# Altium PCB PCB2.PcbDoc
Units mil, origin at the board's own origin, x right, y up, seen from the top; angles counter-clockwise.
Board outline 2155 x 1785 mil, 2 copper layers (Top Layer, Bottom Layer); 14 components, 12 nets, 32 pads, 1 vias.
Unrouted connection lines stored in the file: 1.
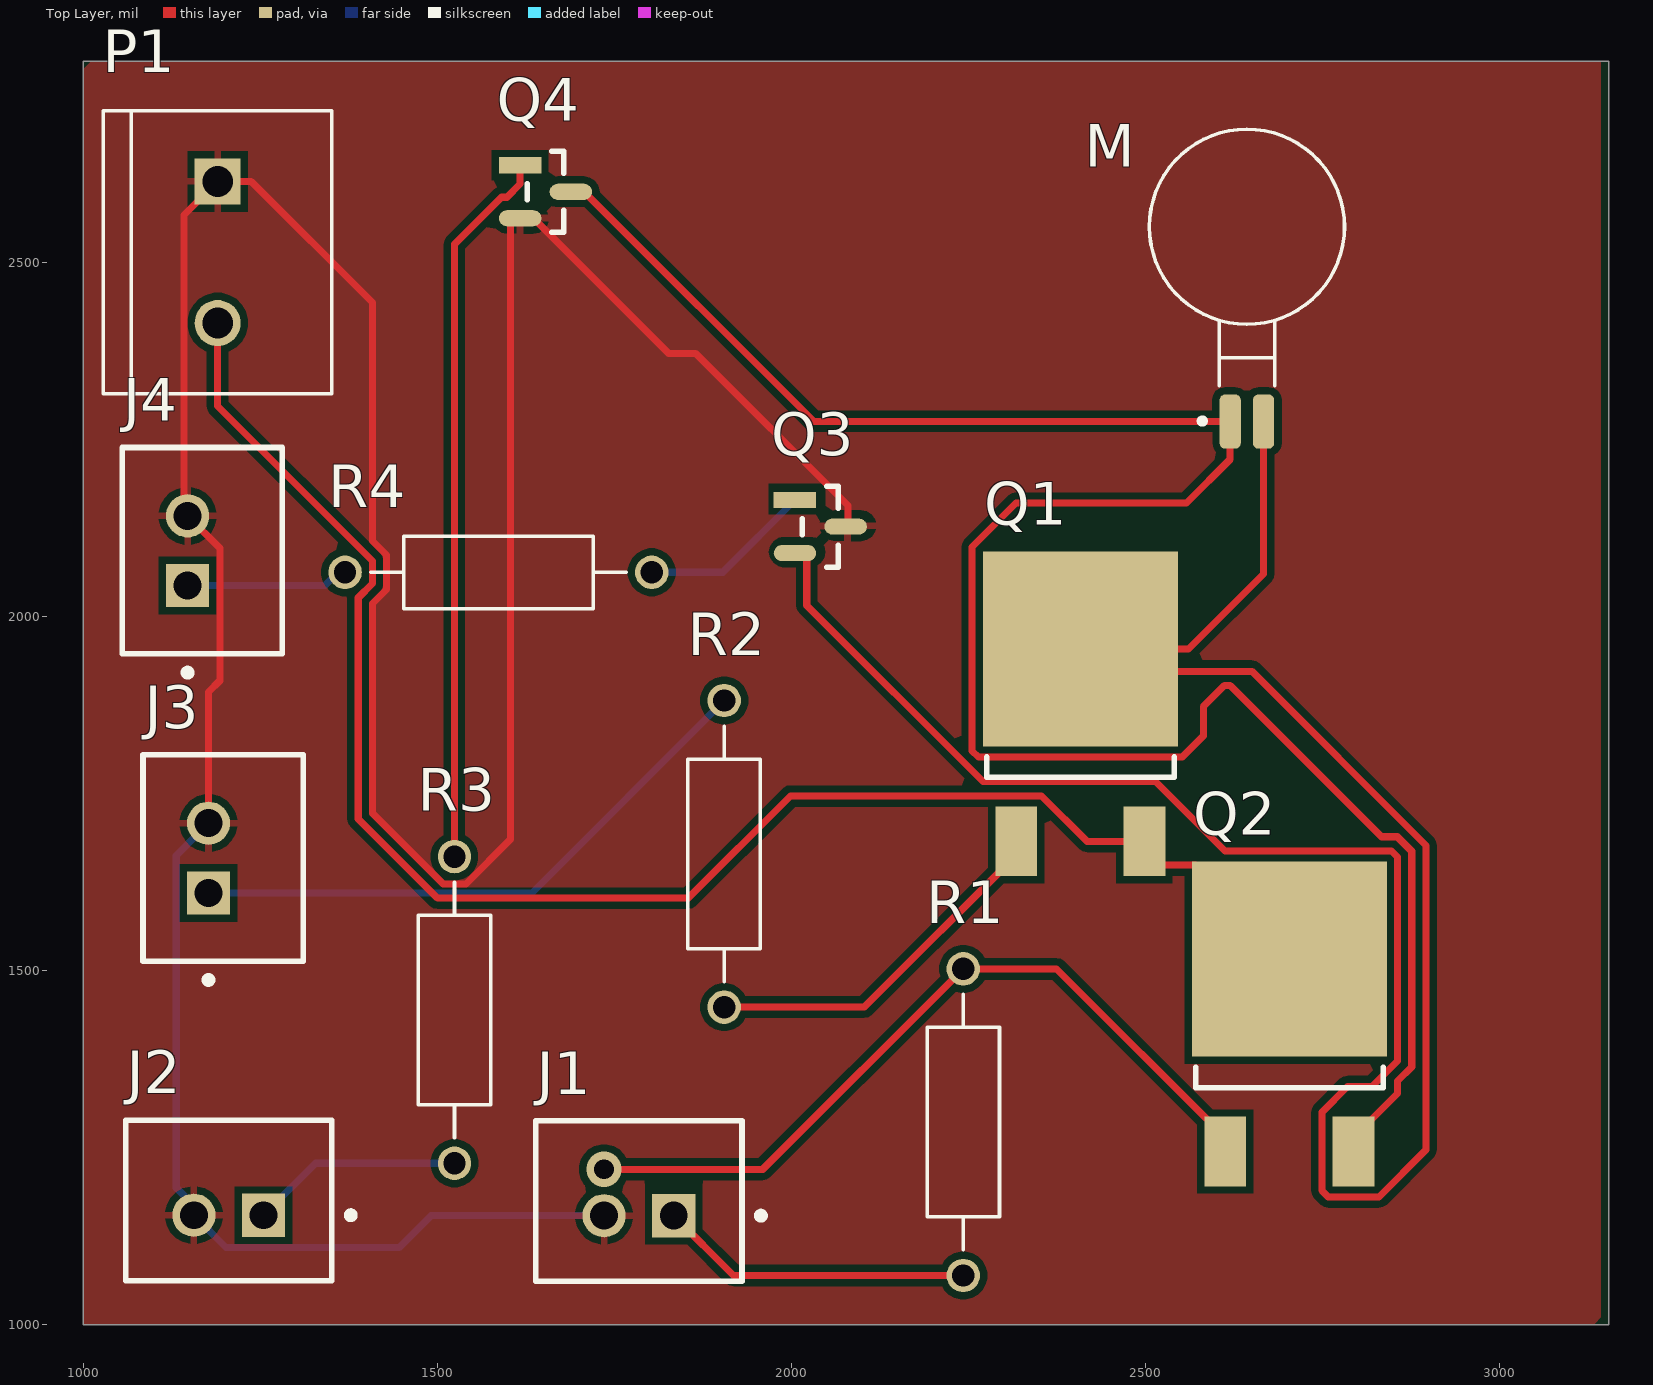
[diagram p0: Top Layer view]
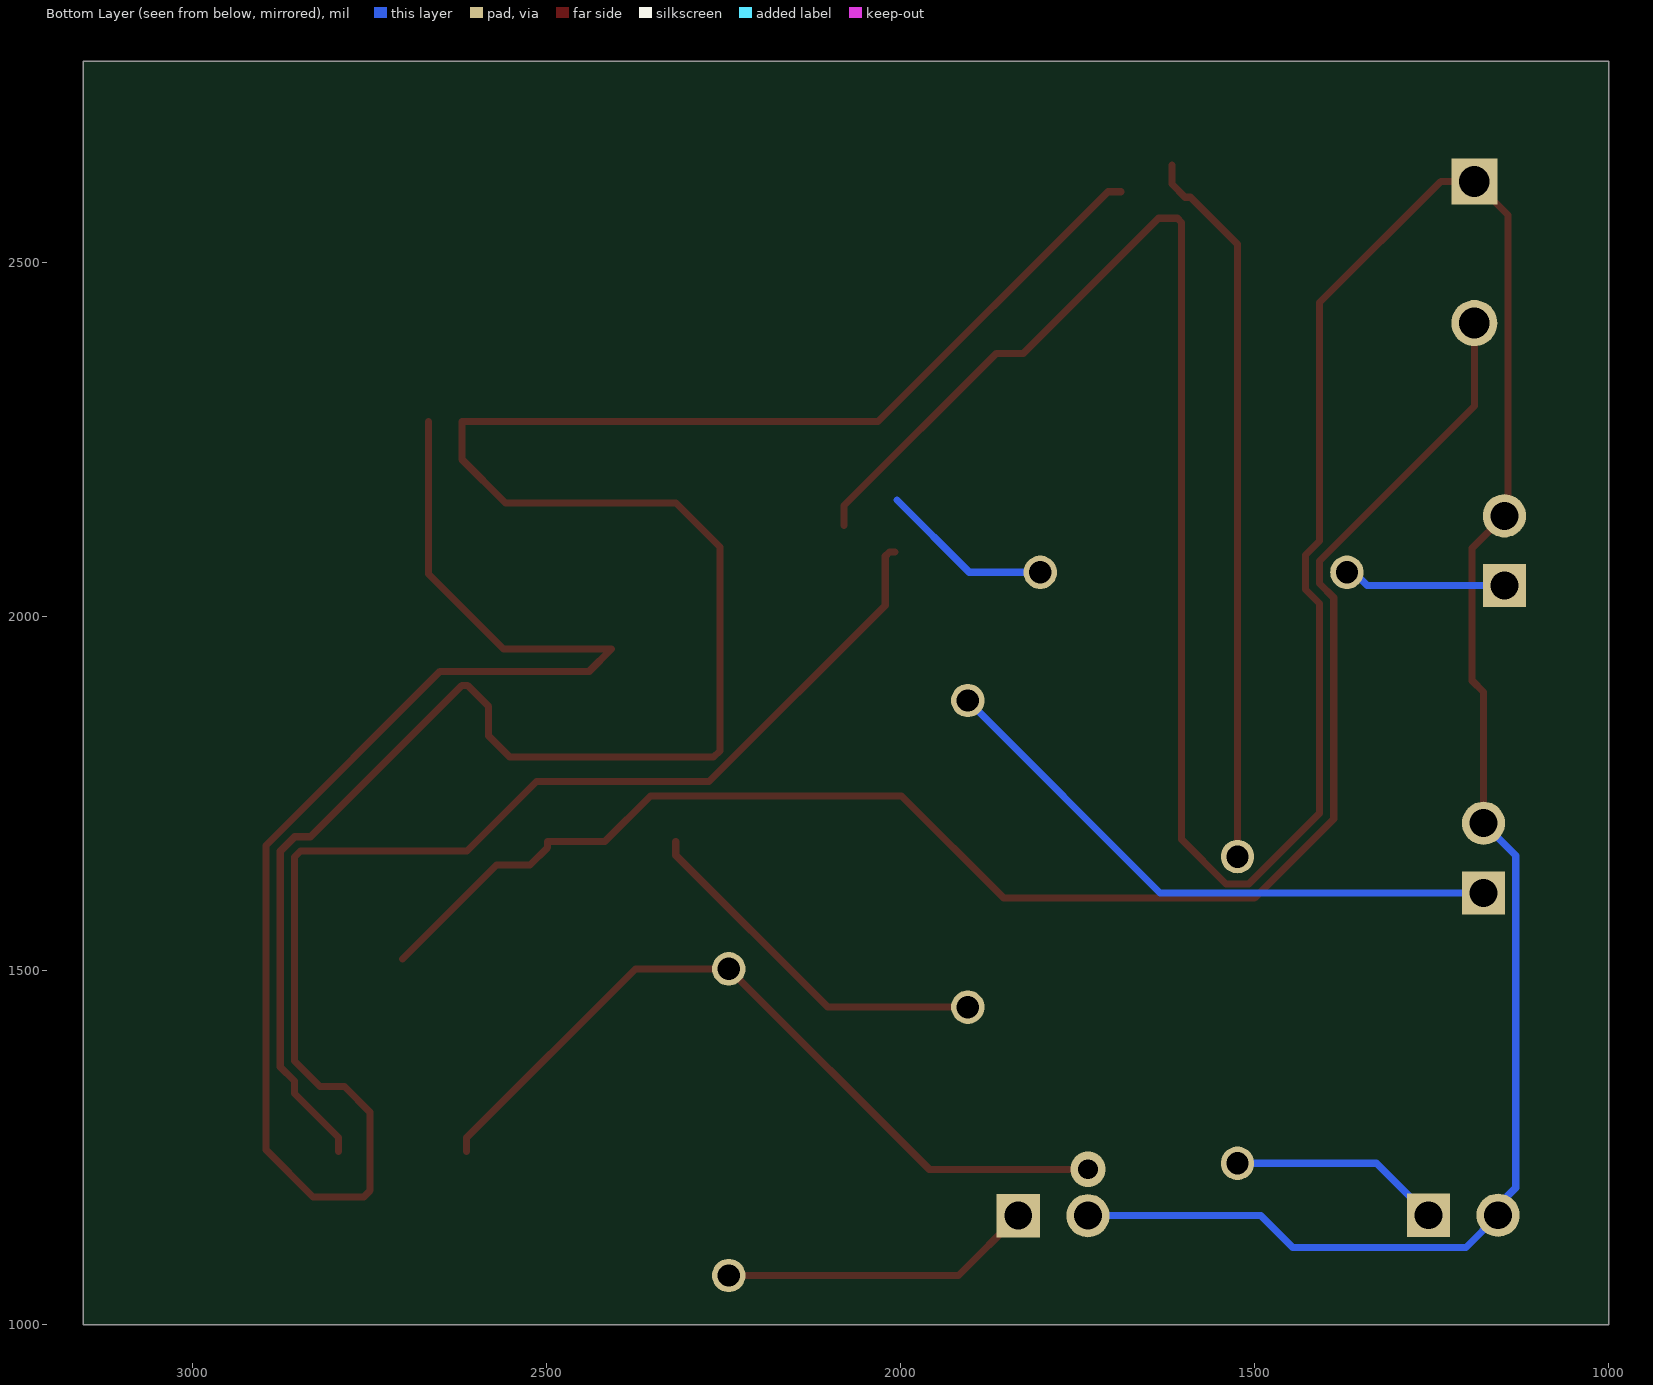
[diagram p1: Bottom Layer view, seen from below]
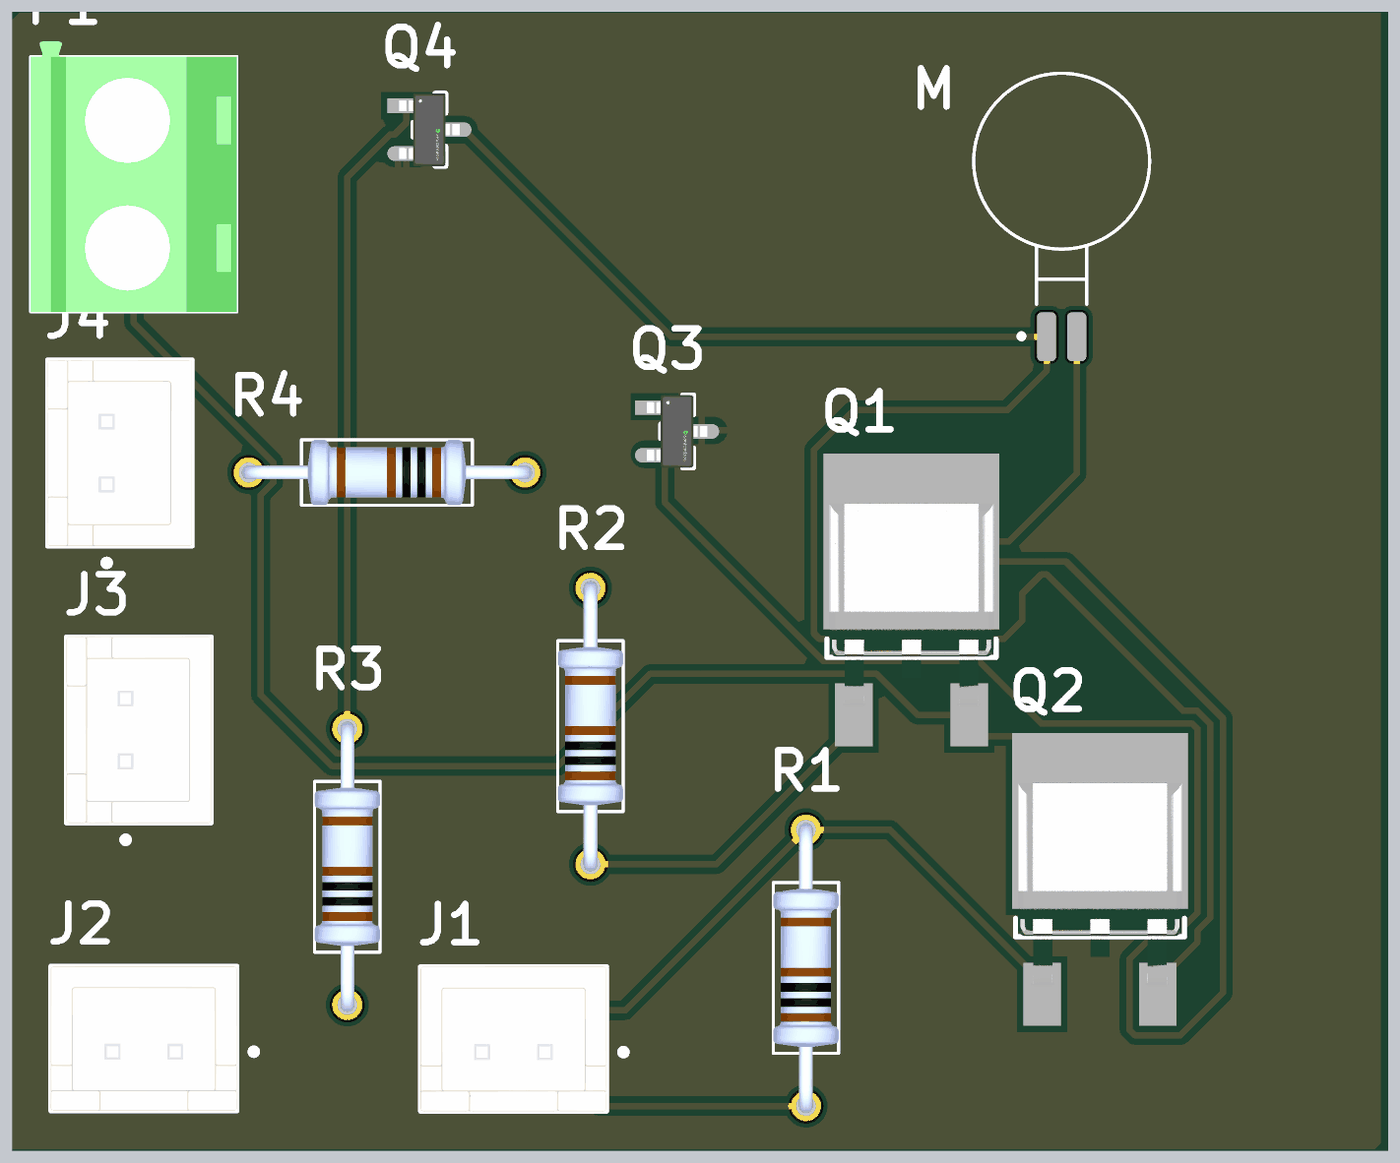
[diagram p2: 3D render of the assembled board from above, using the file's embedded part models]

## Layer stack, top to bottom
Top Solder: solder mask 0.4, Solder Resist, Dk 3.5
Top Layer: signal copper 1.4
Dielectric 1: dielectric 12.6, FR-4, Dk 4.8
Bottom Layer: signal copper 1.4
Bottom Solder: solder mask 0.4, Solder Resist, Dk 3.5

## Board outline
1000,1000 3155,1000 3155,2785 1000,2785

## Design rules (kind name [scope] priority, off if disabled: settings)
Clearance [All] p1: gap=10 ignorepadtopadclearanceinfootprint=FALSE
PolygonConnect [All] p1: connectstyle=Relief reliefconductorwidth=10 reliefentries=4 polygonreliefangle="90 Angle" airgapwidth=10
RoutingVias [All] p1: holewidth=28 width=50 viastyle="Through Hole" minholewidth=28 minwidth=50 maxholewidth=28 maxwidth=50
SolderMaskExpansion [All] p1: expansion=4 istentingtop=FALSE
SupplyNets "Schematic Supply Nets_1" [InNet('+12')] p1: voltage=0.000
SupplyNets "Schematic Supply Nets" [InNet('GND')] p2: voltage=0.000
Width [All] p1: maxlimit=10 minlimit=10 preferedwidth=10
30 further rules are at their usual default settings.

## Classes and differential pairs
component class Sheet2: J1 J2 J3 J4 M P1 Q2 Q3 Q4 R1 R2 R3 R4

## Components (designator, comment, footprint, x,y, rotation, side; value= is the part's Value field where it differs from the comment)
J1 "B2B-XH-A(LF)(SN)" FP-B2B-XH-A_LF_SN-MFG 1785,1175 r180 top
J2 "B2B-XH-A(LF)(SN)" FP-B2B-XH-A_LF_SN-MFG 1205.79,1175.67 r180 top
J3 "B2B-XH-A(LF)(SN)" FP-B2B-XH-A_LF_SN-MFG 1197.83,1659.45 r90 top
J4 "B2B-XH-A(LF)(SN)" FP-B2B-XH-A_LF_SN-MFG 1168.31,2093.5 r90 top
M "C0720B001F" XDCR_C0720B001F 2643.7,2473.43 r0 top
P1 "282837-2" TE_282837-2 1190,2515 r270 top
Q1 "IRFR5410TRPBF" FP-PG-TO252-3-MFG 2408.46,1863.19 r0 top
Q2 "IRFR5410TRPBF" FP-PG-TO252-3-MFG 2703.74,1425.2 r0 top
Q3 "BSS138" FP-318-08-IPC_B 2041.25,2127.46 r0 top
Q4 "BSS138" FP-318-08-IPC_B 1653.14,2600.39 r0 top
R1 "MFR-25FBF52-10K" RESAD1100W55L680D260 2243.11,1286.42 r90 top
R2 "MFR-25FBF52-10K" RESAD1100W55L680D260 1905.51,1665.35 r90 top
R3 "MFR-25FBF52-10K" RESAD1100W55L680D260 1524.61,1444.88 r90 top
R4 "MFR-25FBF52-10K" RESAD1100W55L680D260 1586.61,2062.99 r180 top

## Footprints (in the part's own frame and the unit in brackets; to place one, negate y for a bottom-side part, rotate by r counter-clockwise, add the part's x,y. Pads: shape width x height; smd on the part's side, far side on the other; paste and mask are expansions set on the pad)
FP-318-08-IPC_B [mm]
  rect 1.524x0.578 smd paste+0 mask+0: 1(-0.91,0.95)
  rrect100% 1.524x0.578 smd paste+0 mask+0: 2(-0.91,-0.95) 3(0.91,0)
  silkscreen extent -0.65,-1.45 0.65,1.45, body extent -1.92,-1.7 1.92,1.7, height 0.25
FP-B2B-XH-A_LF_SN-MFG [mm]
  rect 1.55x1.55 hole 1 paste-2539.97 mask+0: 1(-1.25,0.525)
  round 1.55 hole 1 paste-2539.97 mask+0: 2(1.25,0.525)
  silkscreen extent -4.5,-2.88 3.7,2.88, body extent -3.8,-2.98 3.8,2.98, height 0.25
FP-PG-TO252-3-MFG [mm]
  rect 1.5x2.5 smd paste+0 mask+0: 1(-2.3,-4.575) 3(2.3,-4.575)
  rect 7x7 smd paste+0 mask+0: 4(0,2.325)
  silkscreen extent -3.36,-2.28 3.36,-1.55, body extent -3.6,-5.92 3.6,5.92, height 0.25
RESAD1100W55L680D260 [mm]
  round 1.2 hole 0.8: 1(-5.5,0) 2(5.5,0)
  silkscreen extent -4.58,-1.3 4.58,1.3, body extent -5.77,-1.3 5.77,1.3, height 2.6
TE_282837-2 [mm]
  rect 1.65x1.65 / inner round 1.65 / far side rect 1.65x1.65 hole 1.1: 1(-2.54,0)
  round 1.65 hole 1.1: 2(2.54,0)
  silkscreen extent -5.08,-4.1 5.08,4.1, body extent -5.68,-4.1 5.08,4.1, height 10
XDCR_C0720B001F [mm]
  rrect50% 0.76x1.94 smd: 1(-0.6,-5.02) 2(0.6,-5.02)
  silkscreen extent -3.5,-5.1 3.5,5.47

## Part data
J1 J2 J3 J4: library part CMP-2000-05888-3, "CONN HEADER VERT 2POS 2.5MM", Color=Natural, Contact Resistance=20mR, Current Rating=3A, Housing Color=White, Insulation Resistance=1GR, Max Operating Temperature=85°C, Max Voltage Rating (AC)=250V, Min Operating Temperature=-25°C, Connector Type="Male Pin", Contact Material=Brass, Contact Plating=Tin, Contact Type="Male Pin", Depth=5.75mm, Fastening Type=Detent, Housing Material=Polyamide, Lead Free="Lead Free", Lead Pitch=2.5mm, Length=7.4mm, Max Current Rating=3A, Max Voltage Rating (DC)=250V, Mount="Through Hole", Number of Contacts=2, Number of Positions=2, Number of Rows=1, Orientation=Straight, Packaging=Bulk, Pitch=2.5mm, REACH SVHC="No SVHC", Series=XH, Termination=Solder, Voltage Rating=250V, Voltage Rating (AC)=250V, Wire/Cable Gauge=22AWG
M: "DC Motor Vibration, ERM 10000 RPM 3VDC", Package="Jinlong Machinery", Availability=Unavailable, MF="Jinlong Machinery", MP=C0720B001F, Price=None, SnapEDA_Link=https://www.snapeda.com/parts/C0720B001F/Jinlong%20Machinery%20%26%20Electronics%2C%20Inc./view-part/645169/?ref=snap
P1: "Ð Ð°Ð·ÑŠÐµÐ¼Ð½Ñ‹Ðµ ÐºÐ»ÐµÐ¼Ð¼Ð½Ñ‹Ðµ ÐºÐ¾Ð»Ð¾Ð´ÐºÐ¸ Ð Ð¾Ð·ÐµÑ‚ÐºÐ° 2 Ð¿Ð¾Ð»Ð¾Ð¶ÐµÐ½Ð¸Ñ 5,08 Ð¼Ð¼ ÐŸÑ€Ð¸Ð¿Ð¾Ð¹ Ð¿Ñ€ÑÐ¼Ð¾Ð¹ Ñ‡ÐµÑ€ÐµÐ· Ð¾Ñ‚Ð²ÐµÑ€ÑÑ‚Ð¸Ðµ 13,5 Ð / ÐºÐ¾Ð½Ñ‚Ð°ÐºÑ‚", Package=None, Availability="In Stock", Check_prices=https://www.snapeda.com/parts/282837-2/TE+Connectivity+AMP+Connectors/view-part/?ref=eda, MF="TE Connectivity", MP=282837-2, Price=None, Purchase-URL=https://pricing.snapeda.com/search/part/282837-2/?ref=eda, SnapEDA_Link=https://www.snapeda.com/parts/282837-2/TE+Connectivity+AMP+Connectors/view-part/?ref=snap
Q1 Q2: library part CMP-32901-000090-1, "MOSFET P-CH 100V 13A DPAK", Continuous Drain Current=-13A, Drain to Source Breakdown Voltage=-100V, Drain to Source Resistance=0.205Ω, Gate To Source Voltage=20V, Input Capacitace At Vds="760pF @ -25V", Manufacturer=Infineon, Max Forward Diode Voltage=-1.6V, Max Junction Temp=+150°C, Package=PG-TO252-3, Power Dissipation=66W, Pulse Drain Current=-52A, Temperature="-55°C to +150°C", Temperature Range Low=-55°C, Automotive=No, Category=Trans, ComponentLink2Description=Datasheet, ComponentLink2URL=https://www.infineon.com/dgdl/irfr5410pbf.pdf?fileId=5546d462533600a4015356356f622107, Depletion Mode=False, Device Class L1="Discrete Semiconductors", Device Class L2=Transistors, Device Class L3=MOSFETs, Digikey Description="MOSFET P-CH 100V 13A DPAK", Drain To Source Voltage=-100V, Footprint Url=http://www.irf.com/package/hexfet/dpakfootprint.pdf, Gate Charge At Vgs="58nC @ -10V", Height=2.52mm, Lead Free=Yes, Manufacturer Part Number=IRFR5410TRPBF, Number Of Channels=1, Number Of P Channels=1, Octopart=https://octopart.com/irfr5410trpbf-infineon-65874169, Reverse Recovery Charge=650nC, Reverse Recovery Time=130ns, RoHS=TRUE, Rthja Max=50°C/W, Temperature Range High=+150°C, Threshold Vgs Max=-4V, Threshold Vgs Min=-2V, Turn Off Delay Time=45ns, Turn On Delay Time=15ns
Q3 Q4: library part CMP-07173-000101-1, "MOSFET N-CH 50V 220MA SOT-23", Case/Package=SOT-23, Continuous Drain Current (ID)=220mA, Drain to Source Breakdown Voltage=50V, Drain to Source Resistance=3.5R, Gate to Source Voltage (Vgs)=20V, Input Capacitance=27pF, Max Operating Temperature=150°C, Max Power Dissipation=360mW, Min Operating Temperature=-55°C, On-State Resistance=6R, Package Quantity=1, Threshold Voltage=1.3V, Contact Plating=Tin, Current Rating=220mA, Drain to Source Voltage (Vdss)=50V, Dual Supply Voltage=50V, Element Configuration=Single, Fall Time=9ns, Height=0.93mm, Lead Free="Lead Free", Length=2.92mm, Mount="Surface Mount", Nominal Vgs=1.3V, Number of Elements=1, Number of Pins=3, Packaging="Tape and Reel", Power Dissipation=360mW, Radiation Hardening=No, Rds On Max=3.5R, REACH SVHC="No SVHC", Rise Time=9ns, Termination=SMD/SMT, Turn-Off Delay Time=20ns, Turn-On Delay Time=2.5ns, Voltage Rating (DC)=50V, Weight=0.03g, Width=1.3mm
R1 R2 R3 R4: "10.2 kOhms Â±1% 0.25W, 1/4W Through Hole Resistor Axial - Metal Film", Package="Axial Yageo", Availability="In Stock", Check_prices=https://www.snapeda.com/parts/MFR-25FBF52-10K/Yageo/view-part/?ref=eda, MF=Yageo, MP=MFR-25FBF52-10K, Price=None, Purchase-URL=https://pricing.snapeda.com/search/part/MFR-25FBF52-10K/?ref=eda, SnapEDA_Link=https://www.snapeda.com/parts/MFR-25FBF52-10K/Yageo/view-part/?ref=snap

## Via types
v1: diameter 50, hole 28, Top Layer to Bottom Layer, 1 vias

## Nets (pads, with @x,y where several pads share a name; then routed paths per layer and width w, separated by ;. In a path a pad name is that pad's centre, name@x,y a point inside that pad or via, vN(x,y) a via of type N, cw(c..) or ccw(c..) an arc to the next point about the centre after c; other vN are vias at no path point)
+12: P1.2 Q1.3 Q2.4 | length 2321.4
  Top Layer w10: P1.2 1190,2297.69 1408.7,2078.99 1408.7,2046.99 1388.7,2026.99 1388.7,1714.42 1500.32,1602.8 1854.75,1602.8 1999.23,1747.28 2353.65,1747.28 2417.87,1683.07 Q1.3 2499.02,1674.06 2523.54,1649.53 2570.94,1649.53 Q2.4
GND: J1.2 J2.2 J3.2 J4.2 P1.1 Q3.3 Q4.2 | length 4989.3
  Top Layer w10: J3.2 1177.17,1893.75 1193.15,1909.73 1193.15,2097.2 J4.2 1142.52,2147.83 1142.52,2567.52 P1.1 1237.48,2615 1408.7,2443.78 1408.7,2107.27 1428.7,2087.27 1428.7,2038.71 1408.7,2018.71 1408.7,1722.7 1508.61,1622.8 1540.6,1622.8 1603.68,1685.87 1603.68,2557.1 1609.57,2562.99 Q4.2 1635.94,2562.99 1826.69,2372.24 1865.15,2372.24 2080.13,2157.27 Q3.3@2080.13,2128.94
  Bottom Layer w10: J3.2 1131.65,1663.15 1131.65,1193.73 1156.57,1168.81 J2.2 1202.09,1109.49 1446.52,1109.49 1491.36,1154.33 J1.2
MCU1: J1.1 R1.1 | length 443.9
  Top Layer w10: J1.1 1918.66,1069.88 R1.1
MCU2: J2.1 R3.1 | length 300
  Bottom Layer w10: J2.1 1328.35,1228.35 R3.1
MCU3: J4.1 R4.2 | length 230.2
  Bottom Layer w10: J4.1 1341.3,2044.29 1360,2062.99 R4.2
MCU4: J3.1 R2.2 | length 840.9
  Bottom Layer w10: J3.1 1633.86,1610.24 R2.2
NetM_1: M.1 Q2.3 Q4.3 | length 3068.4
  Top Layer w10: Q4.3 1707.6,2600.39 2032.21,2275.79 M.1 2620.08,2222.6 2558.15,2160.67 2317.6,2160.67 2255.67,2098.73 2255.67,1810.72 2264.46,1801.93 2552.47,1801.93 2582.13,1831.59 2582.13,1873.47 2611.79,1903.13 2620.08,1903.13 2833.68,1689.53 2856.03,1689.53 2876.54,1669.03 2876.54,1364.44 2856.54,1344.44 2856.54,1327.01 2794.29,1264.76 Q2.3
NetM_2: M.2 Q1.4 Q3.2 | length 3331.5
  Top Layer w10: Q3.2@2008.46,2091.54 2016.19,2091.54 2022.08,2085.64 2022.08,2016.02 2270.82,1767.28 2514.76,1767.28 2612.51,1669.53 2847.75,1669.53 2856.54,1660.74 2856.54,1372.72 2820.43,1336.61 2785.87,1336.61 2749.76,1300.5 2749.76,1189.65 2758.55,1180.87 2830.03,1180.87 2896.54,1247.37 2896.54,1677.31 2650.72,1923.13 2440.06,1923.13 Q1.4 2561.26,1954.72 2667.32,2060.79 M.2
NetQ1_1: Q1.1 R2.1 | length 521
  Top Layer w10: R2.1 2103.35,1448.82 2317.91,1663.39 Q1.1
NetQ2_1: Q2.1 R1.2 | length 1113
  Top Layer w10: v1(1735.79,1219.84) 1960,1219.84 R1.2 2375,1502.95 2613.19,1264.76 Q2.1
NetQ3_1: Q3.1 R4.1 | length 244.5
  Bottom Layer w10: R4.1 1903.54,2062.99 2005.41,2164.86
NetQ4_1: Q4.1 R3.2 | length 1019.2
  Top Layer w10: R3.2 1524.61,2526.22 1591.05,2592.67 1598.56,2592.67 1617.31,2611.42 Q4.1

## Polygon pours and split planes (outlines as drawn)
GND on Top Layer "GND_L01_P000" (solid, remove dead copper, pour order 0): 1000,2773.62 1009.84,2783.46 3143.7,2783.46 3143.7,1010.83 3134.84,1001.97 1000,1001.97